# Altium PCB ROS_STM32_Control.PcbDoc
Units mm, origin at the board's own origin, x right, y up, seen from the top; angles counter-clockwise.
Board outline 83.2 x 90.42 mm, 2 copper layers (Top Layer, Bottom Layer); 55 components, 80 nets, 292 pads, 162 vias.
Unrouted connection lines stored in the file: 1.
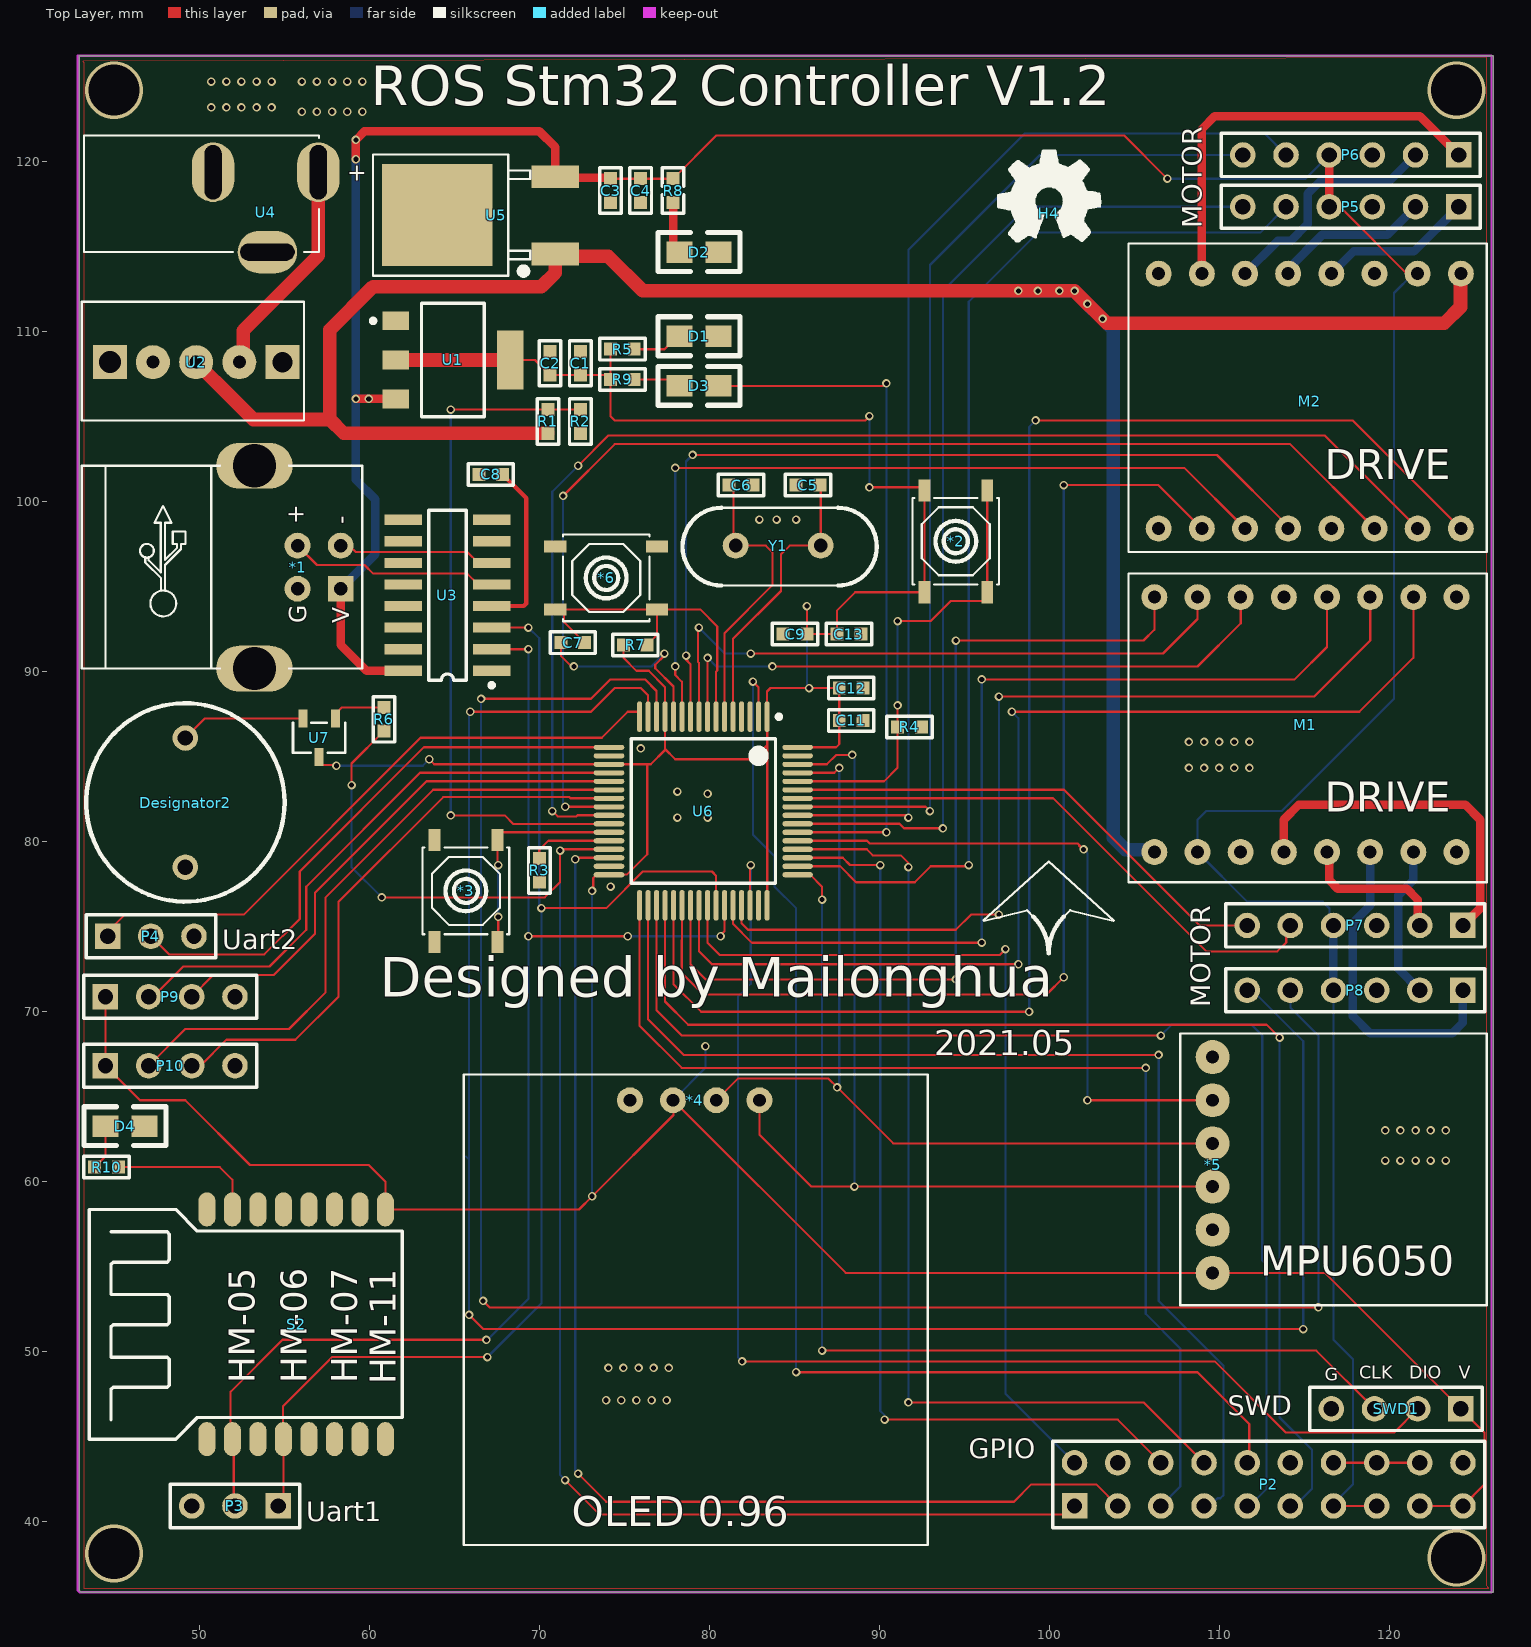
[diagram p0: Top Layer view]
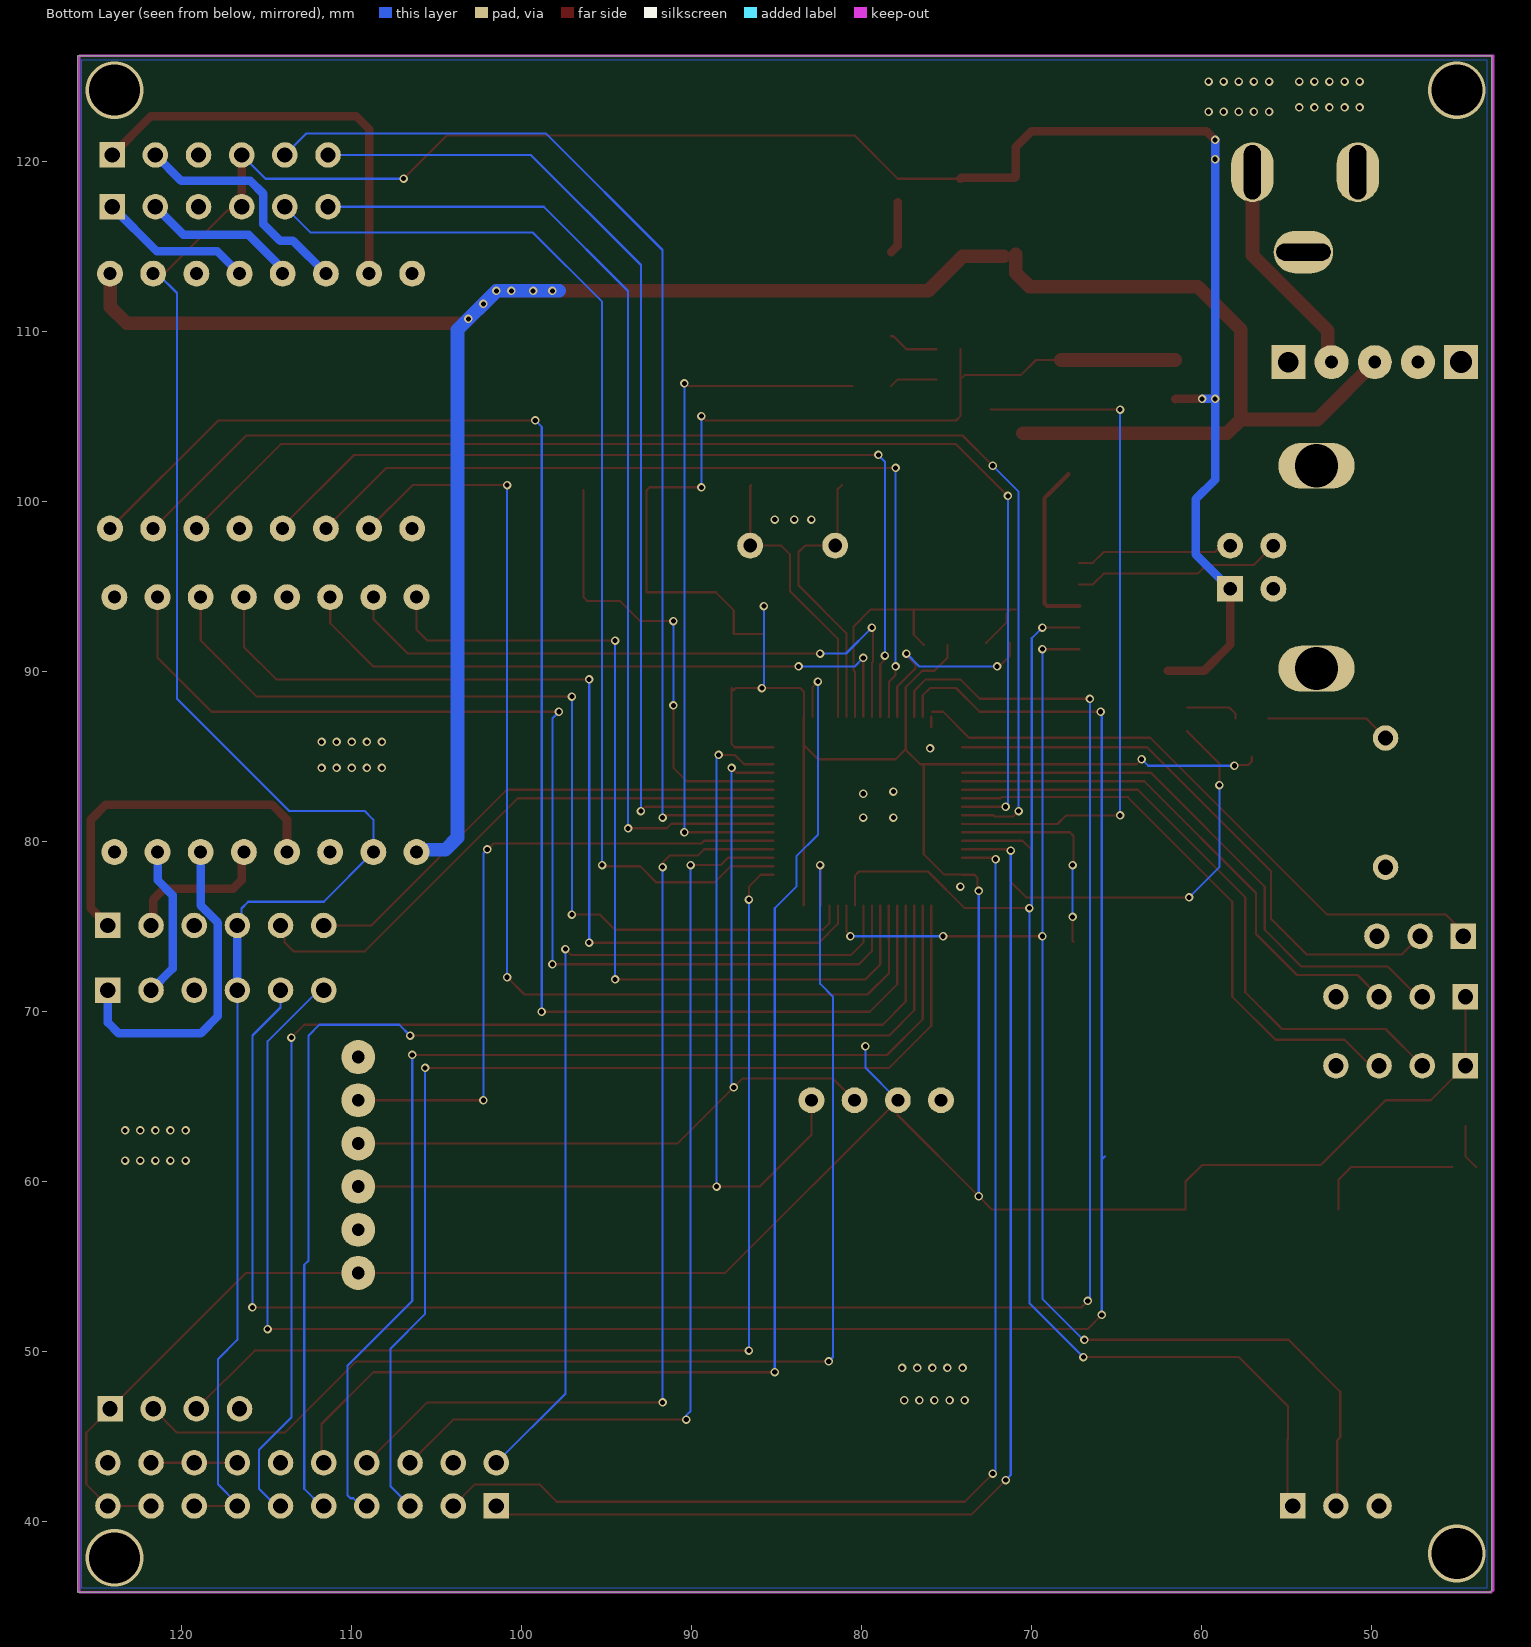
[diagram p1: Bottom Layer view, seen from below]

## Layer stack, top to bottom
Top Solder: solder mask 0.0102, Solder Resist, Dk 3.5
Top Layer: signal copper 0.0356
Dielectric 1: dielectric 0.32, FR-4, Dk 4.8
Bottom Layer: signal copper 0.0356
Bottom Solder: solder mask 0.0102, Solder Resist, Dk 3.5

## Board outline
42.911,39.101 42.911,126.238 126.111,126.238 126.111,35.814 43.023,35.814 42.911,35.926

## Design rules (kind name [scope] priority, off if disabled: settings)
AssemblyTestPointUsage [All] p0: scope1count=1 scope1_0_kind=Board scope1_0_value=Board scope2count=1 scope2_0_kind=Board scope2_0_value=Board commentlength=0
AssemblyTestpoint [All] p0: scope1count=1 scope1_0_kind=Board scope1_0_value=Board scope2count=1 scope2_0_kind=Board scope2_0_value=Board commentlength=0
Clearance [All] p0: scope1count=1 scope1_0_kind=Board scope1_0_value=Board scope2count=1 scope2_0_kind=Board scope2_0_value=Board commentlength=0 gap=0.254
Clearance [All] p1: gap=0.254 ignorepadtopadclearanceinfootprint=TRUE
ComponentClearance [All] p0: scope1count=1 scope1_0_kind=Board scope1_0_value=Board scope2count=1 scope2_0_kind=Board scope2_0_value=Board commentlength=0 gap=0.254 collisioncheckmode=3
DiffPairsRouting [All] p0: scope1count=1 scope1_0_kind=Board scope1_0_value=Board scope2count=1 scope2_0_kind=Board scope2_0_value=Board commentlength=0
DiffPairsRouting [All] p1: maxlimit=0.254 minlimit=0.254 mostfreqgap=0.254 toplayer_minwidth=0.381 toplayer_maxwidth=0.8 toplayer_prefwidth=0.381 bottomlayer_minwidth=0.381 bottomlayer_maxwidth=0.8 bottomlayer_prefwidth=0.381 maxuncoupledlength=12.7
FabricationTestPointUsage [All] p0: scope1count=1 scope1_0_kind=Board scope1_0_value=Board scope2count=1 scope2_0_kind=Board scope2_0_value=Board commentlength=0 valid=0 allowmultiple=FALSE
FabricationTestpoint [All] p0: scope1count=1 scope1_0_kind=Board scope1_0_value=Board scope2count=1 scope2_0_kind=Board scope2_0_value=Board commentlength=0 side=3 testpointundercomponent=TRUE minsize=1.016 maxsize=2.54 preferedsize=1.524 minholesize=0 maxholesize=1.016 preferedholesize=0.813 testpointgrid=0.025
FanoutControl Fanout_BGA [All] p0 off: scope1count=1 scope1_0_kind=Board scope1_0_value=Board scope2count=1 scope2_0_kind=Board scope2_0_value=Board commentlength=69 // Protel DXP Scope 1 Expression Was: IsBGA   Fanout_BGA (Default Rule)
FanoutControl Fanout_LCC [All] p0 off: scope1count=1 scope1_0_kind=Board scope1_0_value=Board scope2count=1 scope2_0_kind=Board scope2_0_value=Board commentlength=69 // Protel DXP Scope 1 Expression Was: IsLCC   Fanout_LCC (Default Rule)
FanoutControl Fanout_SOIC [All] p0 off: scope1count=1 scope1_0_kind=Board scope1_0_value=Board scope2count=1 scope2_0_kind=Board scope2_0_value=Board commentlength=71 // Protel DXP Scope 1 Expression Was: IsSOIC   Fanout_SOIC (Default Rule)
FanoutControl Fanout_Small [All] p0 off: scope1count=1 scope1_0_kind=Board scope1_0_value=Board scope2count=1 scope2_0_kind=Board scope2_0_value=Board commentlength=84 // Protel DXP Scope 1 Expression Was: (CompPinCount < 5)   Fanout_Small (Default Rule)
FanoutControl Fanout_Default [All] p0: scope1count=1 scope1_0_kind=Board scope1_0_value=Board scope2count=1 scope2_0_kind=Board scope2_0_value=Board commentlength=30 // Fanout_Default (Default Rule)
Height [All] p0: scope1count=1 scope1_0_kind=Board scope1_0_value=Board scope2count=1 scope2_0_kind=Board scope2_0_value=Board commentlength=0
HoleSize [All] p0: scope1count=1 scope1_0_kind=Board scope1_0_value=Board scope2count=1 scope2_0_kind=Board scope2_0_value=Board commentlength=0 absolutevalues=TRUE maxlimit=2.54 minlimit=0.025 maxpercent=80.000 minpercent=20.000
HoleToHoleClearance [All] p0: scope1count=1 scope1_0_kind=Board scope1_0_value=Board scope2count=1 scope2_0_kind=Board scope2_0_value=Board commentlength=0
LayerPairs [All] p0: scope1count=1 scope1_0_kind=Board scope1_0_value=Board scope2count=1 scope2_0_kind=Board scope2_0_value=Board commentlength=0 enforce=TRUE
MinimumSolderMaskSliver [All] p0: scope1count=1 scope1_0_kind=Board scope1_0_value=Board scope2count=1 scope2_0_kind=Board scope2_0_value=Board commentlength=0
NetAntennae [All] p0: scope1count=1 scope1_0_kind=Board scope1_0_value=Board scope2count=1 scope2_0_kind=Board scope2_0_value=Board commentlength=0
PasteMaskExpansion [All] p0: scope1count=1 scope1_0_kind=Board scope1_0_value=Board scope2count=1 scope2_0_kind=Board scope2_0_value=Board commentlength=0 expansion=0
PlaneClearance [All] p0: scope1count=1 scope1_0_kind=Board scope1_0_value=Board scope2count=1 scope2_0_kind=Board scope2_0_value=Board commentlength=0 clearance=0.508
PlaneConnect [All] p0: scope1count=1 scope1_0_kind=Board scope1_0_value=Board scope2count=1 scope2_0_kind=Board scope2_0_value=Board commentlength=0 planeconnectstyle=Relief reliefexpansion=0.508 reliefentries=4 reliefconductorwidth=0.254 reliefairgap=0.254
PolygonConnect [All] p0: scope1count=1 scope1_0_kind=Board scope1_0_value=Board scope2count=1 scope2_0_kind=Board scope2_0_value=Board commentlength=0 connectstyle=Relief reliefconductorwidth=0.254 reliefentries=4 polygonreliefangle="90 Angle"
PolygonConnect [All] p1: connectstyle=Relief reliefconductorwidth=0.254 reliefentries=4 polygonreliefangle="90 Angle" airgapwidth=0.254
RoutingCorners [All] p0: scope1count=1 scope1_0_kind=Board scope1_0_value=Board scope2count=1 scope2_0_kind=Board scope2_0_value=Board commentlength=0 cornerstyle=45-Degree minsetback=2.54 maxsetback=2.54
RoutingLayers [All] p0: scope1count=1 scope1_0_kind=Board scope1_0_value=Board scope2count=1 scope2_0_kind=Board scope2_0_value=Board commentlength=0 top layer=Automatic bottom layer=Automatic
RoutingPriority [All] p0: scope1count=1 scope1_0_kind=Board scope1_0_value=Board scope2count=1 scope2_0_kind=Board scope2_0_value=Board commentlength=0
RoutingTopology [All] p0: scope1count=1 scope1_0_kind=Board scope1_0_value=Board scope2count=1 scope2_0_kind=Board scope2_0_value=Board commentlength=0 topology=Shortest
RoutingVias [All] p0: scope1count=1 scope1_0_kind=Board scope1_0_value=Board scope2count=1 scope2_0_kind=Board scope2_0_value=Board commentlength=0 holewidth=0.3 width=0.5 viastyle="Through Hole" minholewidth=0.3 minwidth=0.5 maxholewidth=3 maxwidth=3.7
RoutingVias [All] p1: holewidth=0.3 width=0.5 viastyle="Through Hole" minholewidth=0.3 minwidth=0.5 maxholewidth=3 maxwidth=3.7
ShortCircuit [All] p0: scope1count=1 scope1_0_kind=Board scope1_0_value=Board scope2count=1 scope2_0_kind=Board scope2_0_value=Board commentlength=0 allowed=FALSE
SilkToBoardRegionClearance [All] p0: scope1count=1 scope1_0_kind=Board scope1_0_value=Board scope2count=1 scope2_0_kind=Board scope2_0_value=Board commentlength=0
SilkToSilkClearance [All] p0: scope1count=1 scope1_0_kind=Board scope1_0_value=Board scope2count=1 scope2_0_kind=Board scope2_0_value=Board commentlength=0
SilkToSolderMaskClearance [All] p0 off: scope1count=1 scope1_0_kind=Board scope1_0_value=Board scope2count=1 scope2_0_kind=Board scope2_0_value=Board commentlength=44 // Protel DXP Scope 1 Expression Was: IsPad
SolderMaskExpansion [All] p0: scope1count=1 scope1_0_kind=Board scope1_0_value=Board scope2count=1 scope2_0_kind=Board scope2_0_value=Board commentlength=0 expansion=0.102
SolderMaskExpansion [All] p1: expansion=0.102 istentingtop=FALSE
UnRoutedNet [All] p0: scope1count=1 scope1_0_kind=Board scope1_0_value=Board scope2count=1 scope2_0_kind=Board scope2_0_value=Board commentlength=0
UnpouredPolygon [All] p0: scope1count=1 scope1_0_kind=Board scope1_0_value=Board scope2count=1 scope2_0_kind=Board scope2_0_value=Board commentlength=0
Width [All] p0: scope1count=1 scope1_0_kind=Board scope1_0_value=Board scope2count=1 scope2_0_kind=Board scope2_0_value=Board commentlength=0 maxlimit=0.8 minlimit=0.102 preferedwidth=0.254
Width [All] p1: maxlimit=0.8 minlimit=0.102 preferedwidth=0.254 minimp=50.000000 maximp=50.000000 favimp=50.000000
29 further rules are at their usual default settings.

## Classes and differential pairs
component class STM32F103RB最小系统_RV2: *1 *2 *3 C1 C2 C3 C4 C5 C6 C7 C9 C11 C12 C13 D1 D2 D3 P2 P3 P4 R1 R2 R3 R4 R5 R7 R8 R9 SWD1 U1 U2 U3 U4 U5 U6 Y1
component class DriveSensor: D4 M1 P5 P6 P7 P8 P9 P10 R10

## Components (designator, comment, footprint, x,y, rotation, side; value= is the part's Value field where it differs from the comment)
*1 "USB" USB 59.641,90.15 r90 top
*2 "key_4pin" SW-SMD_4P-L5.1-W5.1-P3.70-LS6.4 94.488,97.663 r90 top
*3 "key_4pin" SW-SMD_4P-L5.1-W5.1-P3.70-LS6.4 65.659,77.089 r270 top
*4 "0.96OLED" 0.96OLED 82.931,64.77 r180 top
*5 "MPU6050_ATK" MPU6060_ATK 107.696,68.707 r270 top
*6 "key_4pin" SW-SMD_4P-L5.1-W5.1-P3.70-LS6.4 73.914,95.504 r180 top (schematic designator *3)
C1 "0.1uF" 0603-res 72.39,108.839 r270 top
C2 "10uF" 0603-res 70.612,107.442 r90 top
C3 "0.1uF" 0603-res 74.168,117.602 r90 top
C4 "10uF" 0603-res 75.946,118.999 r270 top
C5 "22pF" 0603-res 85.09,100.965 r0 top
C6 "22pF" 0603-res 82.55,100.965 r180 top
C7 "0.1uF" 0603-res 71.247,91.694 r0 top
C8 "0.1uF" 0603-res 67.818,101.6 r180 top (schematic designator C7)
C9 "0.1uF" 0603-res 85.725,92.202 r180 top
C11 "0.1uF" 0603-res 87.63,87.122 r0 top
C12 "0.1uF" 0603-res 87.63,89.027 r0 top
C13 "0.1uF" 0603-res 87.503,92.202 r0 top
D1 "LED" 0805 78.232,109.728 r0 top
D2 "LED" 0805 78.232,114.681 r0 top
D3 "LED" 0805 78.232,106.807 r0 top
D4 "LED" 0805 44.45,63.246 r0 top
Designator2 "Comment" Sound 49.149,78.486 r90 top
H4 "OSHW" ? 99.949,116.967 r0 top
M1 "MOTOC_D" 6612 123.952,79.375 r90 top
M2 "MOTOA_B" 6612 106.426,113.411 r270 top
P2 "OutPutPin" HDR2X10 101.473,40.894 r0 top
P3 "TTL" HDR1X3 54.61,40.894 r180 top
P4 "TTL" HDR1X3 44.577,74.422 r0 top
P5 "MotoA" HDR1X6 124.079,117.348 r180 top
P6 "MotoB" HDR1X6 124.079,120.396 r180 top
P7 "MotorC" HDR1X6 124.333,75.057 r180 top
P8 "MotorD" HDR1X6 124.333,71.247 r180 top
P9 "Ultrasonic" HDR1X4 44.45,70.866 r0 top
P10 "Ultrasonic" HDR1X4 44.45,66.802 r0 top
R1 "1K" 0603-res 70.485,104.013 r90 top
R2 "10K" 0603-res 72.39,105.41 r270 top
R3 "3.3K~10K" 0603-res 69.977,78.994 r270 top
R4 "3.3K~10K" 0603-res 92.456,86.741 r180 top
R5 "1K" 0603-res 74.168,108.966 r0 top
R6 "3.3K~10K" 0603-res 60.833,87.884 r270 top (schematic designator R3)
R7 "10K" 0603-res 76.327,91.567 r180 top
R8 "1K" 0603-cap 77.851,118.999 r270 top
R9 "1K" 0603-res 74.168,107.188 r0 top
R10 "470R" 0603-res 45.212,60.833 r180 top
S2 "HM-11" Bluetooth 61.868,46.076 r90 top
SWD1 "Header 4" HDR1X4 124.206,46.609 r180 top
U1 "REG1117-3.3" ZZ311 64.897,108.331 r270 top
U2 "Switch_6pin" Switch_6pin 56.134,111.76 r180 top
U3 "CH340G" SOP16M 64.576,94.488 r90 top
U4 "DC-005" DC-005 43.18,114.681 r0 top
U5 "LM7805" TO-252-2_L6.5-W6.1-P4.58-LS10.0-TL 67.437,116.84 r180 top
U6 "STM32F103RBT6" LQFP64_N 79.629,81.788 r270 top
U7 "SOT-23-3_L2.9-W1.6-P1.90-LS2.8-BR" SOT-23-3_L2.9-W1.6-P1.90-LS2.8-BR 57.023,86.106 r90 top (schematic designator U1)
Y1 "8M" OSC2PR-1 81.523,97.421 r0 top

## Footprints (in the part's own frame and the unit in brackets; to place one, negate y for a bottom-side part, rotate by r counter-clockwise, add the part's x,y. Pads: shape width x height; smd on the part's side, far side on the other; paste and mask are expansions set on the pad)
0.96OLED [mil]
  round 60 hole 30: 1(0,0) 2(100,0) 3(200,0) 4(300,0)
  silkscreen extent -390,-60 685,1030
0603-cap [mil]
  rect 30x30 smd: 1(0,0) 2(55,0)
  silkscreen extent -25,-25 80,25
0603-res [mil]
  rect 30x30 smd: 1(0,0) 2(55,0)
  silkscreen extent -25,-25 80,25
0805 [mil]
  rect 60x50 smd: 1(0,0) 2(90,0)
  silkscreen extent -50,-45 140,45
6612 [mil]
  round 60 hole 30: 0(0,0) 1(0,100) 2(0,200) 3(0,300) 4(0,400) 5(0,500) 6(0,600) 7(0,700) 8(590.55,700) 9(590.55,600) 10(590.55,500) 11(590.55,400) 12(590.55,300) 13(590.55,200) 14(590.55,100) 15(590.55,0)
  silkscreen extent -70,-70 645,760
Bluetooth [mm]
  oval 2x1 smd: 1(-1.245,11.449) 2(-1.245,9.949) 3(-1.245,8.449) 4(-1.245,6.949) 5(-1.245,5.449) 6(-1.245,3.949) 7(-1.245,2.449) 8(-1.245,0.949) 9(12.268,0.949) 10(12.268,2.449) 11(12.268,3.949) 12(12.268,5.449) 13(12.268,6.949) 14(12.268,8.449) 15(12.268,9.949) 16(12.268,11.449)
  silkscreen extent -1.24,-0.05 12.27,18.36
DC-005 [mm] "5.5*2.1"
  oval 2.5x3.5 hole 1 slot 3.2 at 90 deg: 1(13.8,4.7) 3(7.6,4.7)
  oval 3.5x2.5 hole 1 slot 3.2 at 0 deg: 2(10.8,0)
  silkscreen extent 0,0 13.84,6.86
HDR1X3 [mm] "Connector; Header; 3 Position"
  rect 1.5x1.5 hole 0.9: 1(0,0)
  round 1.5 hole 0.9: 2(2.54,0) 3(5.08,0)
  silkscreen extent -1.27,-1.27 6.35,1.27
HDR1X4 [mm] "Connector; Header; 4 Position"
  rect 1.5x1.5 hole 0.9: 1(0,0)
  round 1.5 hole 0.9: 2(2.54,0) 3(5.08,0) 4(7.62,0)
  silkscreen extent -1.27,-1.27 8.89,1.27
HDR1X6 [mm] "Connector; Header; 6 Position"
  rect 1.5x1.5 hole 0.9: 1(0,0)
  round 1.5 hole 0.9: 2(2.54,0) 3(5.08,0) 4(7.62,0) 5(10.16,0) 6(12.7,0)
  silkscreen extent -1.27,-1.27 13.97,1.27
HDR2X10 [mm] "Connector; Header; 10x2 Position"
  rect 1.5x1.5 hole 0.9: 1(0,0)
  round 1.5 hole 0.9: 2(0,2.54) 3(2.54,0) 4(2.54,2.54) 5(5.08,0) 6(5.08,2.54) 7(7.62,0) 8(7.62,2.54) 9(10.16,0) 10(10.16,2.54) 11(12.7,0) 12(12.7,2.54) 13(15.24,0) 14(15.24,2.54) 15(17.78,0) 16(17.78,2.54) 17(20.32,0) 18(20.32,2.54) 19(22.86,0) 20(22.86,2.54)
  silkscreen extent -1.27,-1.27 24.13,3.81
LQFP64_N [mm] "Thin QFP, 64-Leads, Body 10x10mm, Pitch 0.5mm, IPC Medium Density"
  oval 1.8x0.3 smd: 1(-5.55,3.75) 2(-5.55,3.25) 3(-5.55,2.75) 4(-5.55,2.25) 5(-5.55,1.75) 6(-5.55,1.25) 7(-5.55,0.75) 8(-5.55,0.25) 9(-5.55,-0.25) 10(-5.55,-0.75) 11(-5.55,-1.25) 12(-5.55,-1.75) 13(-5.55,-2.25) 14(-5.55,-2.75) 15(-5.55,-3.25) 16(-5.55,-3.75) 33(5.55,-3.75) 34(5.55,-3.25) 35(5.55,-2.75) 36(5.55,-2.25) 37(5.55,-1.75) 38(5.55,-1.25) 39(5.55,-0.75) 40(5.55,-0.25) 41(5.55,0.25) 42(5.55,0.75) 43(5.55,1.25) 44(5.55,1.75) 45(5.55,2.25) 46(5.55,2.75) 47(5.55,3.25) 48(5.55,3.75)
  oval 0.3x1.8 smd: 17(-3.75,-5.55) 18(-3.25,-5.55) 19(-2.75,-5.55) 20(-2.25,-5.55) 21(-1.75,-5.55) 22(-1.25,-5.55) 23(-0.75,-5.55) 24(-0.25,-5.55) 25(0.25,-5.55) 26(0.75,-5.55) 27(1.25,-5.55) 28(1.75,-5.55) 29(2.25,-5.55) 30(2.75,-5.55) 31(3.25,-5.55) 32(3.75,-5.55) 49(3.75,5.55) 50(3.25,5.55) 51(2.75,5.55) 52(2.25,5.55) 53(1.75,5.55) 54(1.25,5.55) 55(0.75,5.55) 56(0.25,5.55) 57(-0.25,5.55) 58(-0.75,5.55) 59(-1.25,5.55) 60(-1.75,5.55) 61(-2.25,5.55) 62(-2.75,5.55) 63(-3.25,5.55) 64(-3.75,5.55)
  silkscreen extent -5.67,-4.25 4.25,4.58
MPU6060_ATK [mm]
  round 2 hole 0.762: 1(1.397,1.905) 2(3.937,1.905) 3(6.477,1.905) 4(9.017,1.905) 5(11.557,1.905) 6(14.097,1.905)
  silkscreen extent 0,0 16,18.03
OSC2PR-1 [mil]
  round 60 hole 32: 1(0.42,-0.46) 2(197.42,-0.46)
  silkscreen extent -123,-93 327,87
SOP16M [mm]
  rect 0.6x2.2 smd: 1(-4.445,-2.6) 2(-3.175,-2.6) 3(-1.905,-2.6) 4(-0.635,-2.6) 5(0.635,-2.6) 6(1.905,-2.6) 7(3.175,-2.6) 8(4.445,-2.6) 9(4.445,2.6) 10(3.175,2.6) 11(1.905,2.6) 12(0.635,2.6) 13(-0.635,2.6) 14(-1.905,2.6) 15(-3.175,2.6) 16(-4.445,2.6)
  silkscreen extent -5.42,-2.72 5,1.1
SOT-23-3_L2.9-W1.6-P1.90-LS2.8-BR [mm]
  rect 1.07x0.532 smd: 1(1.135,-0.95) 2(1.135,0.95) 3(-1.135,0)
  silkscreen extent -0.88,-1.54 0.88,1.54
Sound [mm]
  round 1.5 hole 0.9: 1(0,0) 2(7.6,0)
  silkscreen extent -2.03,-5.84 9.65,5.84
SW-SMD_4P-L5.1-W5.1-P3.70-LS6.4 [mm]
  rect 1.3x0.7 smd: 1(-3,1.85) 2(3,1.85) 3(-3,-1.85) 4(3,-1.85)
  silkscreen extent -2.55,-2.55 2.55,2.55
Switch_6pin [mm]
  rect 2x2 hole 1.2: 1(1.27,3.556)
  round 2 hole 0.762: 2(3.81,3.556) 3(6.35,3.556) 4(8.89,3.556)
  rect 2x2 hole 1.3: 5(11.43,3.556)
  silkscreen extent 0,0 13.08,6.99
TO-252-2_L6.5-W6.1-P4.58-LS10.0-TL [mm]
  rect 2.8x1.35 smd: 1(-3.475,2.275) 3(-3.475,-2.275)
  rect 6.5x6 smd: 4(3.475,-0.017)
  silkscreen extent -2.01,-3.59 7.24,3.56
USB [mm]
  rect 1.524x1.524 hole 0.8: 1(4.719,1.348)
  round 1.524 hole 0.8: 2(7.259,1.348) 3(7.259,3.888) 4(4.719,3.888)
  oval 2.7x4.5 hole 2.54: 5(0.02,6.428) 5(11.958,6.428)
  silkscreen extent 0.02,0.08 11.96,16.59
ZZ311 [mm] "SOT-223/SC-73; 4 Leads; Body 6.7 x 7.3 mm, inc. leads (LxW max)"
  rect 1.1x1.55 smd: 1(-2.3,-3.375) 2(0,-3.375) 3(2.3,-3.375)
  rect 3.45x1.55 smd: 4(0,3.375)
  silkscreen extent -3.35,-4.82 3.35,1.85
? [mm]
  silkscreen extent -3.02,-1.66 3.1,3.75

## Part data
C1 C3 C5 C6 C7 C8 C9 C11 C12 C13: library part Cap, "Capacitor"
C2 C4: library part "Cap Pol1", "Polarized Capacitor (Radial)"
M1 M2: library part 6612
P2: library part "Header 10X2", "Header, 10-Pin, Dual row"
P3 P4: library part "Header 3", "Header, 3-Pin"
P5 P6 P7 P8: library part "Header 6", "Header, 6-Pin"
P9 P10: library part "Header 4", "Header, 4-Pin"
R1 R2 R3 R4 R5 R6 R7 R8 R9 R10: library part Res2, "Resistor"
SWD1: "Header, 4-Pin"
U1: "800mA and 1A Low Dropout Positive Regulator 2.85V, 3.3V, 5V, and Adjustable"
U3: "USB2UART"
U6: "STM32 ARM-based 32-bit MCU with 128 Kbytes Flash, 64-pin LQFP, Industrial Temperature"
Y1: library part XTAL, "Crystal Oscillator"

## Via types
v1: diameter 0.5, hole 0.3, Top Layer to Bottom Layer, 158 vias
v2: diameter 3.4, hole 3, Top Layer to Bottom Layer, 4 vias

## Nets (pads, with @x,y where several pads share a name; then routed paths per layer and width w, separated by ;. In a path a pad name is that pad's centre, name@x,y a point inside that pad or via, vN(x,y) a via of type N, cw(c..) or ccw(c..) an arc to the next point about the centre after c; other vN are vias at no path point)
12V_IN: M1.7 M2.7 R1.1 U2.3 U5.1 | length 142.7
  Top Layer w0.8: 51.957,106.031 U2.3 53.161,104.827 57.658,104.827 ; R1.1 58.472,104.013 57.658,104.827 ; U5.1 70.912,113.457 70.104,112.649 60.198,112.649 57.658,110.109 57.658,104.827 ; U5.1@71.628,114.427 74.041,114.427 76.073,112.395 v1(98.171,112.395) v1(99.314,112.395) v1(100.584,112.395) v1(101.473,112.395) 103.378,110.49 123.229,110.49 124.188,111.449 124.188,113.393 M2.7
  Bottom Layer w0.8: 97.79,112.395 v1(98.171,112.395) v1(99.314,112.395) v1(100.584,112.395) v1(101.473,112.395) 103.759,110.109 103.759,80.225 104.47,79.514 106.033,79.514 M1.7
  other v1: 103.124,110.744 102.235,111.633
+3.3: *2.1 *2.2 *4.3 *5.6 C1.2 C2.1 C9.1 C11.1 C12.1 C13.1 P2.17 P2.19 P9.1 P10.1 R5.1 R7.2 R9.1 S2.9 SWD1.1 U1.2 U1.4 U6.1 U6.13 U6.19 U6.32 U6.48 U6.64 U7.3 | length 259.6
  Top Layer w0.127: P9.1 P10.1 46.482,64.77 49.149,64.77 52.959,60.96 59.944,60.96 60.919,59.985 S2.9 72.314,58.344 v1(73.088,59.118) 77.873,63.903 *4.3@77.873,64.748 ; U7.3 57.023,84.702 57.226,84.499 57.995,84.499 v1(58.039,84.455) ; v1(63.5,84.836) 63.798,84.538 U6.19 76.327,84.538 ; U1.4 69.723,108.331 C2.1 C1.2 73.914,107.442 R9.1 ; v1(73.088,77.089) 73.152,77.089 73.152,77.851 73.339,78.038 U6.32 74.088,78.047 75.126,78.047 76.327,79.248 76.327,84.538 ; R5.1 R9.1 ; R7.2 74.93,90.805 75.692,90.043 76.416,90.043 77.379,89.08 U6.13 77.379,85.435 ; *4.3 *4.3@77.873,64.748 ; U6.48 83.388,76.247 83.388,85.674 ; U6.64 87.443,85.538 87.63,85.725 C11.1 C12.1 87.503,88.9 87.376,89.027 v1(85.852,89.027) 83.588,89.027 83.379,88.818 U6.1 83.388,87.329 83.388,85.674 ; v1(85.725,93.853) C9.1 C13.1 87.503,93.599 88.567,94.663 *2.1 *2.2 92.463,100.838 v1(89.408,100.838) ; v1(89.408,105.029) 89.154,104.775 74.422,104.775 74.168,105.029 R9.1 ; P2.17 P2.19 125.603,42.164 125.603,45.212 SWD1.1 116.205,54.61 *5.6 88.011,54.61 *4.3@77.873,64.748 ; 76.327,84.538 76.537,84.538 77.379,85.38 77.379,85.435 ; 77.379,85.435 77.978,84.836 82.55,84.836 83.388,85.674
  Top Layer w0.8: U1.2 U1.4
  Bottom Layer w0.127: v1(58.039,84.455) 63.119,84.455 v1(63.5,84.836) ; v1(73.088,59.118) v1(73.088,77.089) ; *4.3 79.756,66.675 v1(79.756,67.945) ; v1@85.725,89.221 v1(85.725,93.853) ; v1(89.408,100.838) v1(89.408,105.029)
+5V: *1.1 C3.2 C4.1 M1.6 M2.6 P2.13 P2.15 P5.4 P6.4 P7.4 P8.4 R8.1 U1.3 U3.16 U5.3 | length 201.9
  Top Layer w0.127: C3.2 C4.1 R8.1 80.391,121.539 104.394,121.539 v1(106.934,118.999) ; P5.4 116.664,117.143 117.299,117.143 121.031,113.411 M2.6 ; P2.13 P2.15
  Top Layer w0.5: *1.1 58.293,91.567 59.817,90.043 U3.16 ; v1(59.182,106.045) v1(59.944,106.045) 61.508,106.045 U1.3 ; v1(59.182,120.142) v1(59.182,121.285) 59.69,121.793 69.977,121.793 70.912,120.858 U5.3 70.97,119.057 74.11,119.057 C3.2 ; P5.4 P6.4
  Bottom Layer w0.127: v1(106.934,118.999) 115.062,118.999 P6.4 ; P2.13 116.713,41.021 117.856,42.164 117.856,49.53 116.713,50.673 P8.4 ; P7.4 116.475,75.295 116.475,76.057 116.078,76.454 111.633,76.454 M1.6 108.712,81.28 109.22,81.788 113.665,81.788 120.269,88.392 120.269,112.268 121.412,113.411 M2.6
  Bottom Layer w0.5: *1.1 60.325,96.901 60.325,100.136 59.182,101.279 v1(59.182,106.045) ; v1(59.182,121.285) v1(59.182,120.142) v1(59.182,106.045) ; v1(59.944,106.045) v1(59.182,106.045) ; P8.4 P7.4
Bat+: U2.2 U4.1 | length 13.1
  Top Layer w0.8: U2.2 52.554,108.434 52.554,110.062 56.98,114.488 U4.1
BOOT0: *2.3 *2.4 R4.2 U6.60 | length 27
  Top Layer w0.127: U6.60 90.269,83.538 91.059,84.328 R4.2 v1(91.059,88.011) ; v1(91.059,92.964) 92.999,92.964 94.175,94.14 96.115,94.14 96.338,94.363 *2.3 *2.4
  Bottom Layer w0.127: v1(91.059,88.011) v1(91.059,92.964)
BOOT1: R3.1 U6.28 | length 4.8
  Top Layer w0.127: R3.1 69.977,79.502 70.513,80.038 U6.28
CH340_D+: *1.3 U3.5 | length 12.7
  Top Layer w0.127: *1.3 56.896,96.266 59.69,96.266 60.198,95.758 65.741,95.758 66.376,95.123 U3.5
  Bottom Layer w0.127: *1.3 *1.3@55.972,97.19
CH340_D-: *1.2 U3.6 | length 9.3
  Top Layer w0.127: *1.2 58.801,97.409 59.182,97.028 65.741,97.028 66.376,96.393 U3.6
ch340_uf: C8.1 U3.4 | length 10.3
  Top Layer w0.254: U3.4 69.066,93.853 69.215,94.002 69.215,100.203 68.961,100.457 C8.1
GND: *1.4 *1.5 *3.3 *3.4 *4.4 *5.1 *5.5 *6.3 *6.4 C1.1 C2.2 C3.1 C4.2 C5.1 C6.1 C7.1 C8.2 C9.2 C11.2 C12.2 C13.2 D1.2 D2.2 D4.2 Designator2.1 M1.0 M1.5 M1.15 M2.0 M2.5 M2.15 P2.14 P2.16 P2.18 P2.20 P3.3 P4.3 P5.3 P6.3 P7.3 P8.3 P9.4 P10.4 R2.2 R3.2 R4.1 S2.12 SWD1.4 U1.1 U2.1 U2.5 U3.1 U4.2 U4.3 U5.4 U6.12 U6.18 U6.31 U6.47 U6.63 | length 17.1
  Top Layer w0.127: C7.1 71.247,90.932 v1@72.009,90.17 ; v1(77.343,91.059) 77.343,90.939 76.806,90.402 76.806,90.192 77.879,89.119 U6.12 ; P2.14 P2.16 P2.18 ; M1.15@123.825,94.502 M1.15
  Bottom Layer w0.127: v1(72.009,90.297) 76.581,90.297 v1(77.343,91.059)
  other v1: 73.914,47.117 74.803,47.117 75.692,47.117 76.581,47.117 77.47,47.117 74.041,49.022 74.93,49.022 75.819,49.022 76.708,49.022 77.597,49.022 119.761,61.214 120.65,61.214 121.539,61.214 122.428,61.214 123.317,61.214 119.761,62.992 120.65,62.992 121.539,62.992 122.428,62.992 123.317,62.992 74.168,77.343 78.105,81.407 79.883,81.407 79.883,82.804 78.105,82.931 108.204,84.328 109.093,84.328 109.982,84.328 110.871,84.328 111.76,84.328 75.946,85.471 108.204,85.852 109.093,85.852 109.982,85.852 110.871,85.852 111.76,85.852 82.931,98.933 83.947,98.933 85.09,98.933 56.007,122.936 56.896,122.936 57.785,122.936 58.674,122.936 59.563,122.936 50.673,123.19 51.562,123.19 52.451,123.19 53.34,123.19 54.229,123.19 50.673,124.714 51.562,124.714 52.451,124.714 53.34,124.714 54.229,124.714 56.007,124.714 56.896,124.714 57.785,124.714 58.674,124.714 59.563,124.714
  other v2: 123.952,37.846 44.958,38.1 44.958,124.206 123.952,124.206
KEY_GPIO: *3.1 *3.2 U6.27 | length 12.9
  Top Layer w0.127: *3.2 67.564,74.144 v1(67.564,75.565) ; v1(67.564,78.613) 67.509,78.668 *3.1 67.509,80.315 67.732,80.538 U6.27
  Bottom Layer w0.127: v1(67.564,75.565) v1(67.564,78.613)
LED_STATUS: D3.2 U6.54 | length 41.6
  Top Layer w0.127: D3.2 90.19,106.807 90.337,106.954 v1(90.404,106.954) ; U6.54 v1(90.404,80.538)
  Bottom Layer w0.127: v1(90.404,80.538) v1(90.404,106.954)
Motor_A_IN1: M2.10 U6.24 | length 72
  Top Layer w0.127: v1(71.374,100.33) 74.422,103.378 75.692,103.378 102.489,103.378 114.159,103.378 M2.10 ; v1(71.503,82.04) 74.077,82.04 U6.24
  Bottom Layer w0.127: v1(71.374,100.33) 71.374,82.169 v1(71.503,82.04)
Motor_A_IN2: M2.9 U6.25 | length 76.9
  Top Layer w0.127: v1(70.739,81.788) 71.055,81.472 72.155,81.472 72.22,81.538 U6.25 ; v1(72.263,102.108) 74.041,103.886 116.191,103.886 M2.9
  Bottom Layer w0.127: v1(70.739,81.788) 70.739,100.584 v1(72.263,102.108)
Motor_A_O1: M2.4 P5.1 | length 9.1
  Bottom Layer w0.5: M2.4 117.891,114.716 121.447,114.716 P5.1
Motor_A_O2: M2.3 P5.2 | length 9.3
  Bottom Layer w0.5: M2.3 114.046,113.688 116.055,115.697 119.888,115.697 P5.2
Motor_A_PWM: M2.8 U6.37 | length 88.8
  Top Layer w0.127: U6.37 77.879,71.6 79.502,69.977 v1(98.806,69.977) ; v1(99.187,104.775) 117.842,104.775 M2.8
  Bottom Layer w0.127: v1(98.806,69.977) 98.806,104.394 v1(99.187,104.775)
Motor_B_IN1: M2.12 U6.10 | length 52.6
  Top Layer w0.127: v1(78.613,90.932) 78.613,90.702 78.879,90.436 U6.10 ; v1(78.994,102.743) 109.855,102.743 M2.12@114.117,98.481
  Bottom Layer w0.127: v1(78.613,90.932) 78.613,102.362 v1(78.994,102.743)
Motor_B_IN2: M2.13 U6.11 | length 49.8
  Top Layer w0.127: v1(77.978,90.297) 77.978,89.789 78.37,89.397 78.37,87.347 U6.11 ; v1(77.978,101.981) 107.936,101.981 M2.13
  Bottom Layer w0.127: v1(77.978,90.297) v1(77.978,101.981)
Motor_B_O1: M2.1 P6.1 | length 24.9
  Top Layer w0.5: M2.1 108.966,121.92 109.728,122.682 121.793,122.682 P6.1
Motor_B_O2: M2.2 P6.2 | length 14
  Bottom Layer w0.5: M2.2 113.442,115.347 114.204,115.347 115.189,116.332 115.189,118.11 115.951,118.872 120.015,118.872 P6.2
Motor_B_PWM: M2.14 U6.38 | length 65.6
  Top Layer w0.127: U6.38 78.379,74.215 78.359,74.195 78.359,72.263 79.629,70.993 99.822,70.993 v1(100.838,72.009) ; v1(100.838,100.965) 106.412,100.965 M2.14
  Bottom Layer w0.127: v1(100.838,72.009) v1(100.838,100.965)
Motor_C_IN1: M1.10 U6.8 | length 37.6
  Top Layer w0.127: U6.8 79.883,87.342 v1(79.883,90.805) ; v1(83.693,90.297) 108.712,90.297 111.252,92.837 M1.10
  Bottom Layer w0.127: v1(79.883,90.805) 80.391,90.297 v1(83.693,90.297)
Motor_C_IN2: M1.9 U6.9 | length 37.4
  Top Layer w0.127: v1(79.375,92.583) 79.311,92.519 79.311,90.574 79.379,90.506 U6.9 ; v1(82.423,91.059) 106.68,91.059 108.712,93.091 M1.9
  Bottom Layer w0.127: v1(79.375,92.583) 80.899,91.059 v1(82.423,91.059)
Motor_C_O1: M1.4 P7.1 | length 20.8
  Top Layer w0.508: M1.4 113.792,81.28 114.681,82.169 124.46,82.169 125.349,81.28 125.349,76.073 P7.1
Motor_C_O2: M1.3 P7.2 | length 9.3
  Top Layer w0.5: M1.3@116.713,79.375 M1.3 116.459,79.248 116.459,77.724 116.967,77.216 121.031,77.216 121.666,76.581 121.666,75.184 P7.2
Motor_C_PWM: M1.8 U6.39 | length 53.3
  Top Layer w0.127: U6.39 78.879,72.759 79.756,71.882 v1(94.488,71.882) ; v1(94.488,91.821) 105.537,91.821 106.172,92.456 M1.8
  Bottom Layer w0.127: v1(94.488,71.882) v1(94.488,91.821)
Motor_D_IN1: M1.12 U6.44 | length 55.7
  Top Layer w0.127: U6.44 81.379,75.147 82.485,74.041 v1(96.012,74.041) ; v1(96.012,89.535) 114.427,89.535 116.332,91.44 M1.12
  Bottom Layer w0.127: v1(96.012,74.041) v1(96.012,89.535)
Motor_D_IN2: M1.13 U6.45 | length 55.3
  Top Layer w0.127: U6.45 81.879,75.186 82.262,74.803 94.488,74.803 95.377,75.692 v1(97.028,75.692) ; v1(97.028,88.519) 115.57,88.519 118.872,91.821 M1.13
  Bottom Layer w0.127: v1(97.028,75.692) v1(97.028,88.519)
Motor_D_O1: M1.2 P8.1 | length 19.1
  Bottom Layer w0.5: M1.2 118.872,76.232 117.856,75.216 117.856,69.723 118.872,68.707 123.698,68.707 124.333,69.342 P8.1
Motor_D_O2: M1.1 P8.2 | length 9
  Bottom Layer w0.5: M1.1 121.412,77.724 120.523,76.835 120.523,72.517 P8.2
Motor_D_PWM: M1.14 U6.40 | length 65.5
  Top Layer w0.127: U6.40 79.379,73.529 80.137,72.771 97.409,72.771 v1(98.171,72.771) ; v1(97.79,87.63) 118.237,87.63 121.412,90.805 M1.14
  Bottom Layer w0.127: v1(97.79,87.63) 98.171,87.249 v1(98.171,72.771) v1@98.044,72.771
MPU_I2C_SCL: *4.2 *5.3 U6.61 | length 52.7
  Top Layer w0.127: *4.2 81.661,66.04 86.995,66.04 v1(87.503,65.532) 90.805,62.23 *5.3 ; U6.61 87.34,84.038 v1(87.63,84.328)
  Bottom Layer w0.127: v1(87.503,65.532) 87.63,65.659 v1(87.63,84.328)
MPU_I2C_SDA: *4.1 *5.4 U6.62 | length 58.9
  Top Layer w0.127: *4.1 82.931,62.738 85.979,59.69 v1(88.519,59.69) *5.4 ; U6.62 86.895,84.538 87.447,85.09 v1(88.392,85.09)
  Bottom Layer w0.127: v1(88.392,85.09) 88.519,84.963 v1(88.519,59.69)
MPU_INT: *5.2 U6.53 | length 39.6
  Top Layer w0.127: U6.53 89.259,80.038 89.414,79.883 101.656,79.883 v1(102.009,79.53) 101.953,79.53 101.727,79.756 ; v1(102.235,64.77) *5.2
  Bottom Layer w0.127: v1(102.009,79.53) 102.235,79.304 v1(102.235,64.77)
NetC5_2: C5.2 U6.5 Y1.2 | length 16.9
  Top Layer w0.127: U6.5 81.379,91.92 84.201,94.742 84.201,96.901 84.709,97.409 Y1.2 86.538,100.914 C5.2
NetC6_2: C6.2 U6.6 Y1.1 | length 16.9
  Top Layer w0.127: U6.6 80.879,92.255 83.693,95.069 83.693,97.028 83.312,97.409 Y1.1 81.407,97.536 81.407,100.711 C6.2
NetC8_1: U6.3
NetC10_1: U6.4
NetD1_1: D1.1 R5.2 | length 3
  Top Layer w0.127: R5.2 77.343,108.966 78.105,109.728 D1.1
NetD2_1: D2.1 R8.2 | length 3.1
  Top Layer w0.5: R8.2 77.851,115.062 D2.1
NetD3_1: D3.1 R9.2 | length 2.8
  Top Layer w0.127: R9.2 77.851,107.188 D3.1
NetD4_1: D4.1 R10.2 | length 2.7
  Top Layer w0.127: R10.2 44.45,61.468 D4.1
NetR10_1: R10.1 S2.15 | length 8.8
  Top Layer w0.127: R10.1 51.181,60.833 51.919,60.095 S2.15
NRST: *6.1 *6.2 C7.2 R7.1 U6.7 | length 20.2
  Top Layer w0.127: *6.2 *6.2@71.214,93.654 ; C7.2 71.437,92.901 71.437,93.431 *6.2@71.214,93.654 ; R7.1 76.914,92.154 *6.1 ; U6.7 80.379,89.99 80.45,90.062 80.45,92.651 79.447,93.654 *6.1 ; *6.2@71.214,93.654 *6.1
PA0: P8.5 U6.14 | length 116.7
  Top Layer w0.127: v1(66.548,88.392) 73.025,88.392 74.168,89.535 76.2,89.535 76.879,88.856 U6.14 ; v1(66.675,52.959) 67.056,52.578 v1(115.824,52.578)
  Bottom Layer w0.127: v1(66.548,88.392) 66.548,53.086 v1(66.675,52.959) ; P8.5 114.173,70.231 115.824,68.58 v1(115.824,52.578)
PA1: P8.6 U6.15 | length 128.4
  Top Layer w0.127: v1@65.786,52.197 66.675,51.308 v1(114.935,51.308) ; v1(65.913,87.63) 73.025,87.63 74.422,89.027 75.946,89.027 76.379,88.594 U6.15
  Bottom Layer w0.127: 65.659,61.468 65.849,61.277 v1(65.849,52.133) 65.849,87.566 v1(65.913,87.63) ; P8.6 111.927,71.247 114.935,68.239 v1(114.935,51.308)
PA2: P4.1 U6.16 | length 37.5
  Top Layer w0.127: P4.1 44.577,74.676 45.593,75.692 52.578,75.692 62.992,86.106 73.66,86.106 75.184,87.63 U6.16@75.819,87.63 ; U6.16@75.879,86.736 U6.16
PA3: P4.2 U6.17 | length 34.1
  Top Layer w0.127: P4.2 48.185,73.354 53.796,73.354 55.88,75.438 55.88,78.232 63.186,85.538 U6.17
PA4: P9.2 U6.20 | length 34
  Top Layer w0.127: P9.2 47.244,70.866 49.022,72.644 54.102,72.644 56.261,74.803 56.261,77.343 62.956,84.038 U6.20
PA5: P9.3 U6.21 | length 31.2
  Top Layer w0.127: P9.3 50.8,72.136 54.356,72.136 56.769,74.549 56.769,76.962 63.345,83.538 U6.21
PA6: P10.2 U6.22 | length 37.1
  Top Layer w0.127: P10.2 49.149,68.961 55.245,68.961 57.404,71.12 57.404,76.708 63.734,83.038 U6.22
PA7: P10.3 U6.23 | length 34.4
  Top Layer w0.127: P10.3 50.038,66.802 51.562,68.326 55.626,68.326 58.166,70.866 58.166,76.454 64.319,82.607 71.738,82.607 71.808,82.538 U6.23
PA8: P2.2 U6.41 | length 52.1
  Top Layer w0.127: U6.41 79.879,74.045 80.614,73.31 97.059,73.31 v1(97.409,73.66)
  Bottom Layer w0.127: v1(97.409,73.66) 97.409,47.498 P2.2
PA9: P3.1 S2.4 U3.3 U6.42 | length 78.9
  Top Layer w0.127: P3.1 54.919,41.203 S2.4 54.891,44.858 54.891,46.763 57.785,49.657 v1(66.929,49.657) ; U3.3 v1(69.342,92.583) ; v1(70.104,76.073) 73.914,76.073 76.073,78.232 80.137,78.232 80.379,77.99 U6.42
  Bottom Layer w0.127: v1(66.929,49.657) 70.104,52.832 v1(70.104,76.073) ; v1(69.342,92.583) 69.973,91.952 v1@69.973,76.073
PA10: P3.2 S2.2 U3.2 U6.43 | length 80.2
  Top Layer w0.127: P3.2 51.995,40.969 51.995,44.756 S2.2 51.816,44.934 51.816,47.625 54.864,50.673 v1@66.802,50.673 ; U3.2 v1(69.342,91.313) ; v1(69.342,74.422) v1(75.184,74.422) ; v1(80.645,74.422) 80.645,74.489 80.879,74.723 80.879,76.22 80.888,76.229 U6.43
  Bottom Layer w0.127: v1@66.802,50.673 66.929,50.673 69.342,53.086 v1(69.342,74.422) v1(69.342,91.313) ; v1(75.184,74.422) v1(80.645,74.422)
  other v1: 66.865,50.673
PA13: SWD1.2 U6.46 | length 74.1
  Top Layer w0.127: v1(81.915,49.403) 109.728,49.403 113.919,45.212 120.269,45.212 SWD1.2 ; U6.46 82.379,78.569 v1(82.423,78.613)
  Bottom Layer w0.127: v1(81.915,49.403) 81.661,49.657 81.661,70.866 82.423,71.628 v1(82.423,78.613)
PA14: SWD1.3 U6.49 | length 63
  Top Layer w0.127: U6.49 85.919,78.038 86.614,77.343 v1(86.614,76.581) ; v1(86.614,50.038) 115.697,50.038 SWD1.3
  Bottom Layer w0.127: v1(86.614,50.038) v1(86.614,76.581)
PA15: P5.5 U6.50 | length 65
  Top Layer w0.127: U6.50 87.678,78.538 88.619,77.597 92.075,77.597 93.016,78.538 95.175,78.538 v1(95.25,78.613)
  Bottom Layer w0.127: v1(95.25,78.613) 95.25,111.76 99.314,115.824 112.395,115.824 P5.5
PB0: R1.2 R2.1 U6.26 | length 41
  Top Layer w0.127: v1(64.77,81.534) 67.945,81.534 68.453,81.026 74.067,81.026 U6.26 ; v1(64.77,105.41) R1.2 R2.1
  Bottom Layer w0.127: v1(64.77,81.534) v1(64.77,105.41)
PB3: P5.6 U6.55 | length 60
  Top Layer w0.127: U6.55 91.174,81.038 91.44,80.772 v1(93.726,80.772)
  Bottom Layer w0.127: v1(93.726,80.772) 93.726,112.395 98.679,117.348 P5.6
PB4: P6.5 U6.56 | length 65.6
  Top Layer w0.127: U6.56 91.563,81.538 v1(91.694,81.407)
  Bottom Layer w0.127: v1(91.694,81.407) 91.694,114.801 98.559,121.666 112.649,121.666 P6.5
PB5: P6.6 U6.57 | length 61.1
  Top Layer w0.127: U6.57 92.714,82.038 v1(92.964,81.788)
  Bottom Layer w0.127: v1(92.964,81.788) 92.964,113.919 99.441,120.396 P6.6
PB6: P7.5 U6.58 | length 33.8
  Top Layer w0.127: U6.58 100.215,82.538 109.22,73.533 113.411,73.533 113.935,74.057 113.935,74.819 P7.5
PB7: P7.6 U6.59 | length 29.8
  Top Layer w0.127: U6.59 100.858,83.038 108.839,75.057 P7.6
PB10: P2.1 R6.2 U6.29 | length 95.1
  Top Layer w0.127: v1(58.928,83.312) 58.928,84.582 R6.2 ; v1(60.706,76.708) 70.299,76.708 71.201,77.61 v1(71.201,79.456) 71.283,79.538 U6.29 ; v1(71.501,42.418) 73.533,40.386 100.965,40.386 P2.1
  Bottom Layer w0.127: v1(58.928,83.312) 58.928,78.486 v1(60.706,76.708) ; v1(71.201,79.456) 71.201,42.718 v1(71.501,42.418)
PB11: P2.3 U6.30 | length 71.6
  Top Layer w0.127: v1(72.094,78.952) 72.18,79.038 U6.30 ; v1(72.263,42.799) 73.914,41.148 97.917,41.148 98.933,42.164 102.743,42.164 P2.3
  Bottom Layer w0.127: v1(72.094,78.952) 72.094,42.968 v1(72.263,42.799)
PB12: P2.5 U6.33 | length 65
  Top Layer w0.127: U6.33 75.879,69.155 78.359,66.675 v1(105.664,66.675)
  Bottom Layer w0.127: v1(105.664,66.675) 105.664,52.197 107.696,50.165 107.696,42.037 P2.5
PB13: P2.7 U6.34 | length 66.5
  Top Layer w0.127: U6.34 76.379,69.544 78.486,67.437 v1(106.426,67.437)
  Bottom Layer w0.127: v1(106.426,67.437) 106.426,52.959 110.236,49.149 110.236,41.529 110.056,41.349 109.886,41.349 109.43,40.894 P2.7
PB14: P2.9 U6.35 | length 71.3
  Top Layer w0.127: U6.35 76.879,70.06 78.359,68.58 v1(106.553,68.58)
  Bottom Layer w0.127: v1(106.553,68.58) 107.188,69.215 111.887,69.215 112.522,68.58 112.522,55.339 112.776,55.085 112.776,41.91 111.76,40.894 P2.9
PB15: P2.11 U6.36 | length 71.7
  Top Layer w0.127: U6.36 77.379,70.576 78.74,69.215 112.776,69.215 v1(113.538,68.453)
  Bottom Layer w0.127: v1(113.538,68.453) 113.538,46.101 115.443,44.196 115.443,41.91 114.427,40.894 P2.11
PC10: P2.6 U6.51 | length 55.1
  Top Layer w0.127: U6.51 87.84,79.038 88.265,78.613 v1(90.043,78.613) ; v1(90.297,45.974) 104.013,45.974 P2.6
  Bottom Layer w0.127: v1(90.043,78.613) 90.043,46.482 90.297,46.228 v1(90.297,45.974)
PC11: P2.8 U6.52 | length 57.5
  Top Layer w0.127: U6.52 89.245,79.538 89.603,79.18 91.254,79.18 91.694,78.74 v1(91.694,78.486) ; v1(91.694,46.99) 105.537,46.99 P2.8
  Bottom Layer w0.127: v1(91.694,46.99) v1(91.694,78.486)
PC13: P2.10 U6.2 | length 74.2
  Top Layer w0.127: v1(82.55,89.408) 82.879,89.079 U6.2 ; v1(85.09,48.768) 108.712,48.768 111.76,45.72 111.76,43.561 P2.10
  Bottom Layer w0.127: v1(82.55,89.408) 82.55,80.391 83.82,79.121 83.82,77.343 85.09,76.073 v1(85.09,48.768)
Print_RXD1: 
Print_TXD1: 
sound: Designator2.2 U7.2 | length 7.4
  Top Layer w0.127: Designator2.2 50.304,87.241 U7.2
sound_in: R6.1 U7.1 | length 3.3
  Top Layer w0.127: U7.1 57.973,87.51 58.347,87.884 R6.1
sound_out: 
USB_VCC: 
pads on no net: M1.11 M2.11 P2.4 P2.12 S2.1 S2.3 S2.5 S2.6 S2.7 S2.8 S2.10 S2.11 S2.13 S2.14 S2.16 U2.4 U3.7 U3.8 U3.9 U3.10 U3.11 U3.12 U3.13 U3.14 U3.15

## Polygon pours and split planes (outlines as drawn)
GND on Top Layer "Top Layer-GND" (solid, pour order 14): 43.116,125.92 43.18,125.857 43.18,36.068 125.857,36.068 125.73,36.195 125.73,126.111
GND on Bottom Layer "Bottom Layer-GND" (solid, pour order 18): 43.18,125.984 43.18,36.068 125.857,36.068 125.857,125.984

## Keep-outs
Keep-Out Layer:
  lines w0.127: 42.814,35.926 42.926,35.814 126.014,35.814 126.014,126.238 42.814,126.238 42.814,35.926

## Silkscreen, mask and mechanical layers (free items; w line width, h text height)
Top Overlay:
  lines w0.127: 96.109,75.345 99.949,78.816 103.789,75.345 ; 96.139,75.311 98.679,75.946 99.051,75.574 ; 100.847,75.574 101.219,75.946 103.759,75.311
  lines w0.254: 99.051,75.574 cw(c96.883,73.406) 99.949,73.406 cw(c103.015,73.406) 100.847,75.574
  text "ROS Stm32 Controller V1.2" at 60.071,122.555 h4.02
  text "MOTOR" at 109.347,116.078 h2 r90
  text "DRIVE" at 116.205,100.711 h3
  text "DRIVE" at 116.205,81.153 h3
  text "Uart2" at 51.308,73.279 h2
  text "MOTOR" at 109.855,70.231 h2 r90
  text "Designed by Mailonghua" at 60.579,70.104 h4
  text "2021.05" at 93.218,66.929 h2.5
  text "MPU6050" at 112.395,53.848 h3
  text "CLK" at 118.237,48.387 h0.76
  text "DIO" at 121.158,48.387 h0.76
  text "V" at 124.079,48.387 h0.76
  text "G" at 116.205,48.26 h0.76
  text "SWD" at 110.49,45.847 h2
  text "GPIO" at 95.25,43.307 h2
  text "Uart1" at 56.261,39.624 h2
  text "OLED 0.96" at 71.882,39.116 h3
Drill Drawing:
  lines w0.8: 49.657,107.823 49.657,108.077

## Text inside footprints (layer, text, board x,y; h text height)
*1: Top Overlay "-" at 58.801,98.679 h1.02 r90; Top Overlay "+" at 56.109,98.679 h1.02 r90; Top Overlay "G" at 56.261,92.837 h1.02 r90; Top Overlay "V" at 58.801,92.837 h1.02 r90
S2: Top Overlay "HM-05" at 53.232,48.108 h1.52 r90; Top Overlay "HM-06" at 56.28,48.108 h1.52 r90; Top Overlay "HM-07" at 59.277,48.108 h1.52 r90
U4: Top Overlay "+" at 58.674,118.872 h1
U6: Mechanical 13 "12v" at 45.847,120.396 h3 r90